# Altium PCB PCB_Bigger.PcbDoc
Units mil, origin at the board's own origin, x right, y up, seen from the top; angles counter-clockwise.
Board outline 3543.31 x 3543.31 mil, 2 copper layers (Top Layer, Bottom Layer); 1 components, 3 nets, 5 pads, 0 vias.
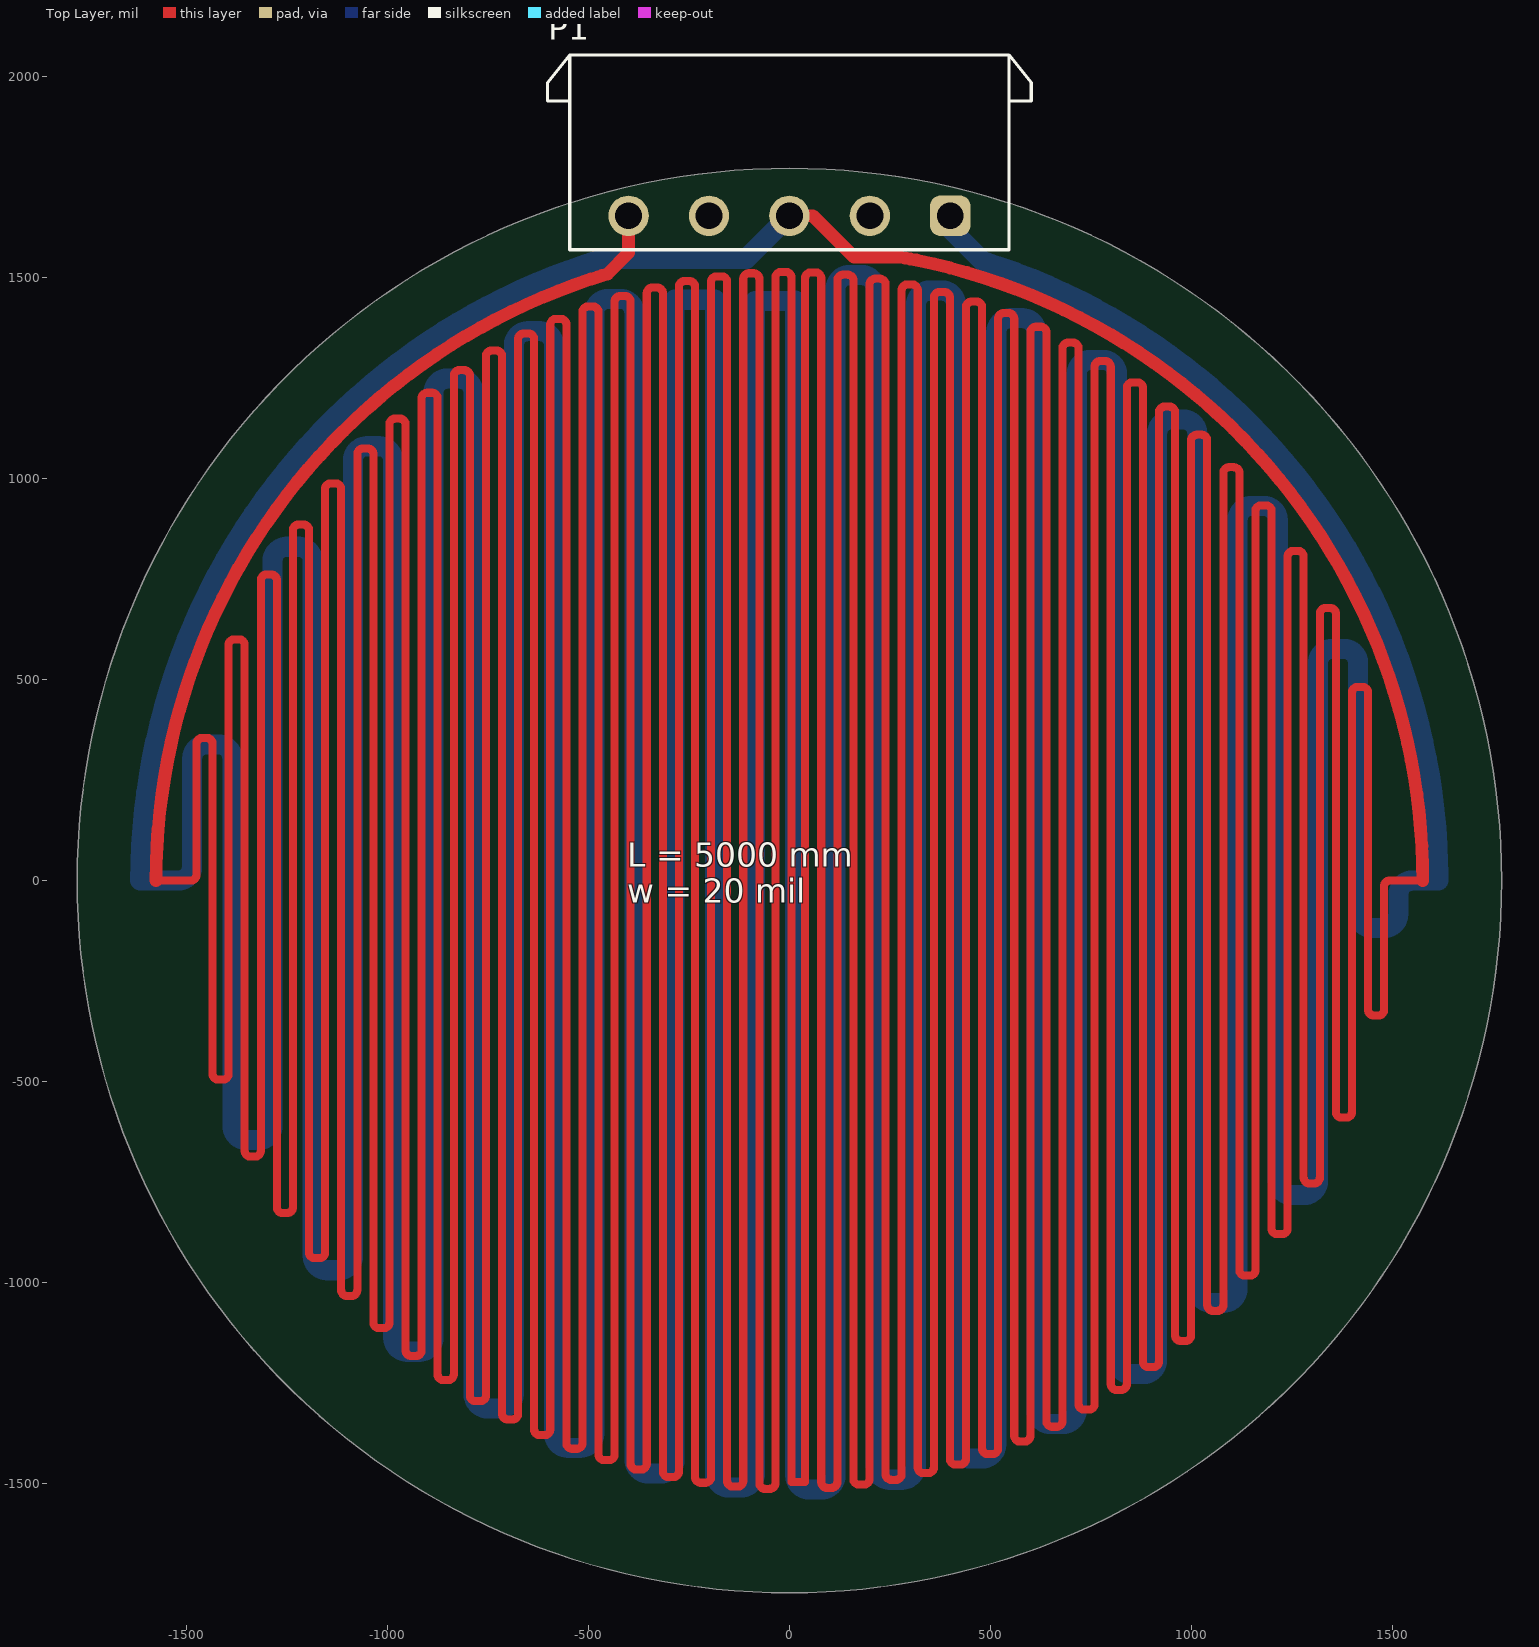
[diagram p0: Top Layer view]
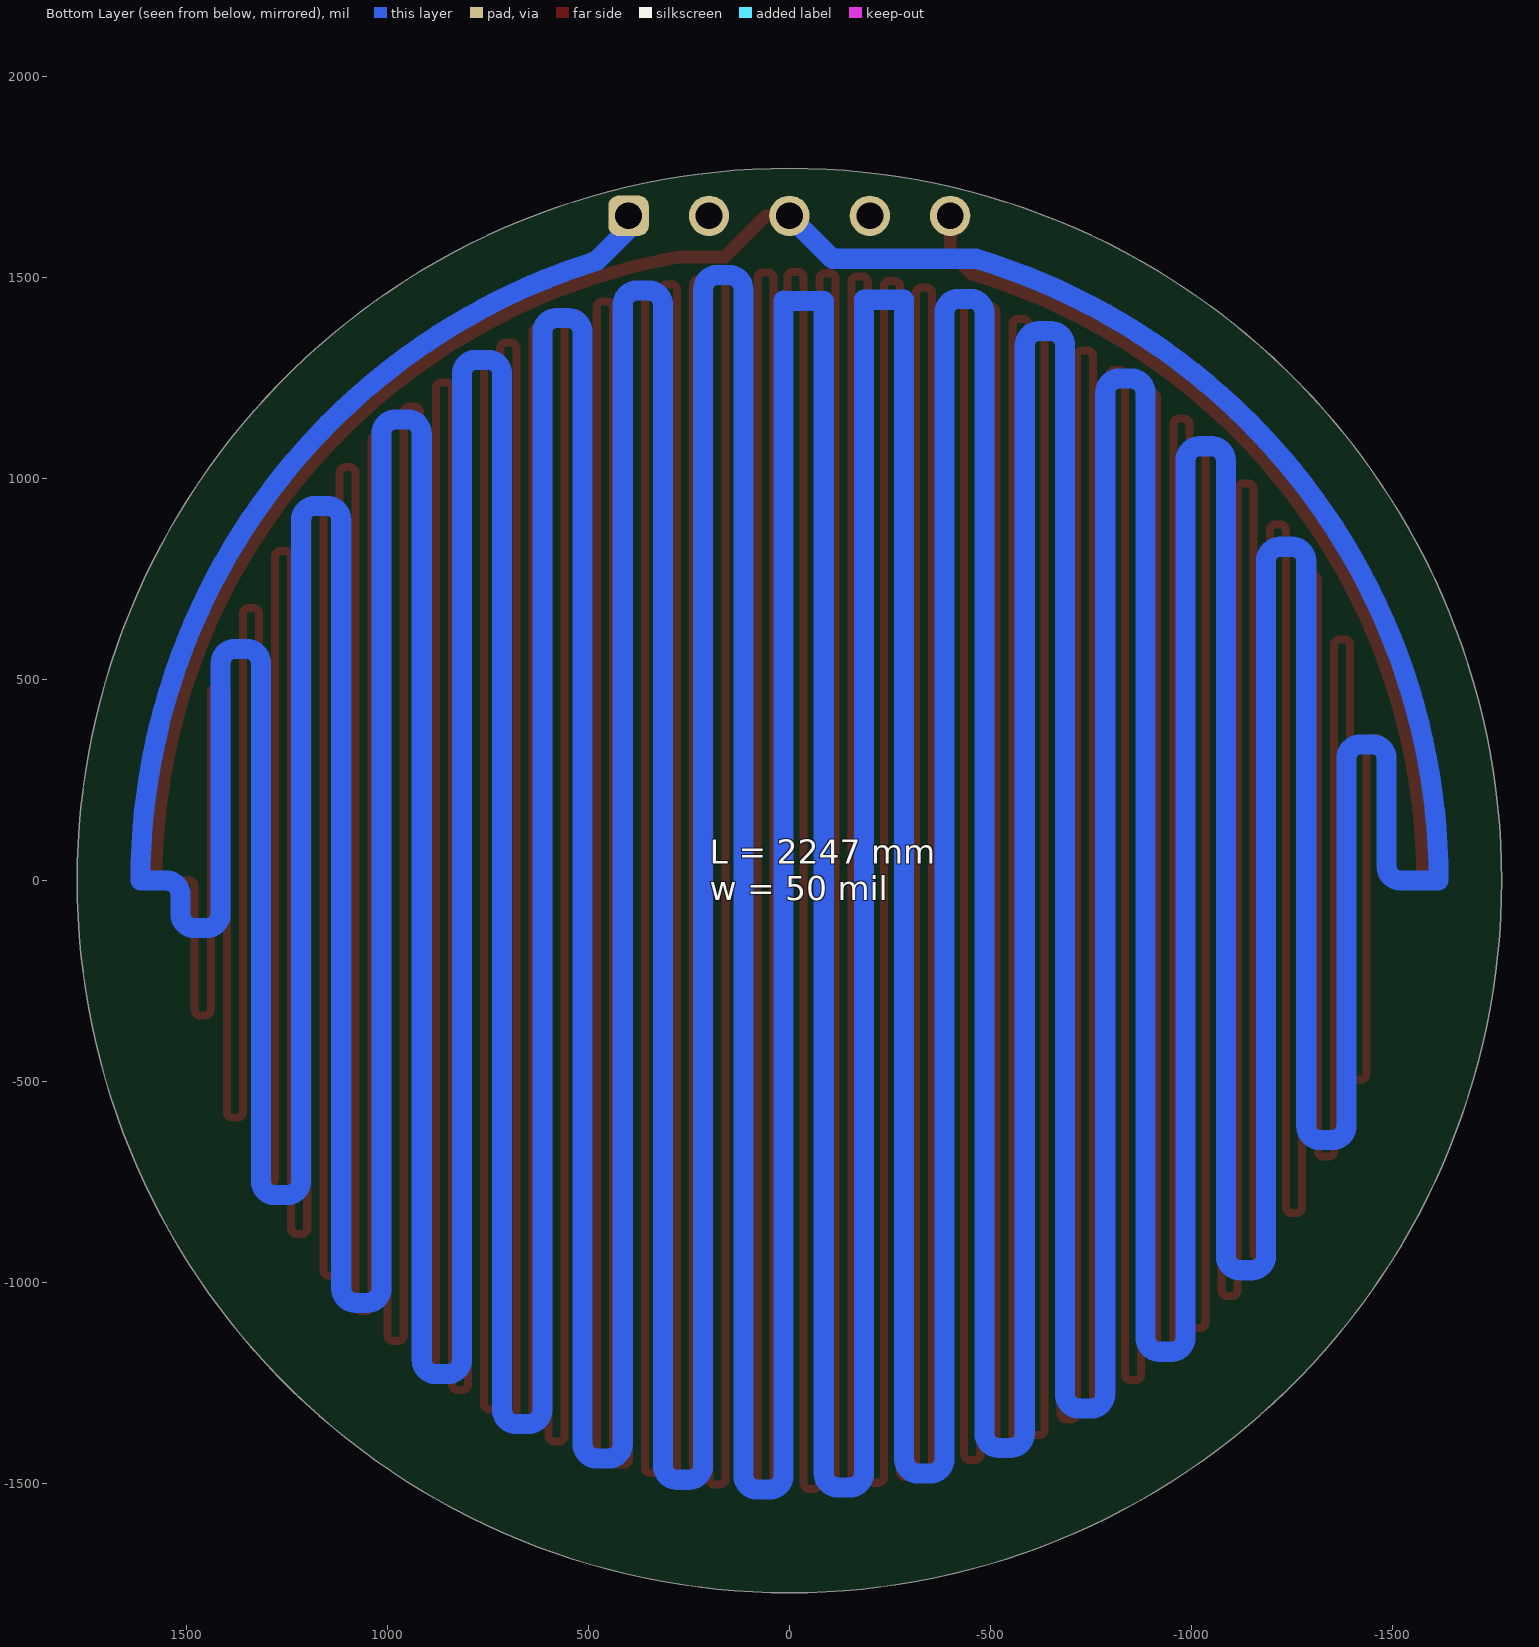
[diagram p1: Bottom Layer view, seen from below]

## Layer stack, top to bottom
Top Solder: solder mask 0.4, Solder Resist, Dk 3.5
Top Layer: signal copper 1.4
Dielectric 1: dielectric 12.6, FR-4, Dk 4.8
Bottom Layer: signal copper 1.4
Bottom Solder: solder mask 0.4, Solder Resist, Dk 3.5

## Board outline
-1771.65,0 ccw(c0,0) 0,-1771.65 ccw(c0,0) 1771.65,0 ccw(c0,0) 0,1771.65 ccw(c0,0)

## Design rules (kind name [scope] priority, off if disabled: settings)
Clearance [All] p1: gap=10
PolygonConnect [All] p1: connectstyle=Relief reliefconductorwidth=10 reliefentries=4 polygonreliefangle="90 Angle" airgapwidth=10
RoutingVias [All] p1: holewidth=28 width=50 viastyle="Through Hole" minholewidth=28 minwidth=50 maxholewidth=28 maxwidth=50
SolderMaskExpansion [All] p1: expansion=4
Width [All] p1: maxlimit=50 minlimit=10 preferedwidth=20 minimp=50.000000 maximp=50.000000 favimp=50.000000
30 further rules are at their usual default settings.

## Components (designator, comment, footprint, x,y, rotation, side; value= is the part's Value field where it differs from the comment)
P1 "691305540005" 691305540005 0,1811.02 r180 top

## Footprints (in the part's own frame and the unit in brackets; to place one, negate y for a bottom-side part, rotate by r counter-clockwise, add the part's x,y. Pads: shape width x height; smd on the part's side, far side on the other; paste and mask are expansions set on the pad)
691305540005 [mm] "5,08mm - PCB Header Horizontal Entry with Plastic Latches - 05p"
  rrect50% 2.55x2.55 hole 1.7: 1(-10.16,4)
  round 2.55 hole 1.7: 2(-5.08,4) 3(0,4) 4(5.08,4) 5(10.16,4)
  silkscreen extent -15.27,-6.15 15.27,6.15, body extent -15.1,-6 15.1,6, height 8.63

## Part data
P1: library part CMP-03913-99613978-1, "691305540005 Terminal Block, R/A Header, 5Pos, Th Rohs Compliant: Yes"

## Nets (pads, with @x,y where several pads share a name; then routed paths per layer and width w, separated by ;. In a path a pad name is that pad's centre, name@x,y a point inside that pad or via, vN(x,y) a via of type N, cw(c..) or ccw(c..) an arc to the next point about the centre after c; other vN are vias at no path point)
FUSE_1: P1.2
FUSE_2: P1.4
NetP1_1: P1.1 P1.3 P1.5 | length 263051.9
  Top Layer w20: -1575.3,0 -1488.8,0 ccw(c-1488.8,14) -1474.8,14 -1474.8,340.68 cw(c-1460.8,340.68) -1460.8,354.68 -1448.8,354.68 cw(c-1448.8,340.68) -1434.8,340.68 -1434.8,-480.96 ccw(c-1420.8,-480.96) -1420.8,-494.96 -1408.8,-494.96 ccw(c-1408.8,-480.96) -1394.8,-480.96 -1394.8,585.99 cw(c-1380.8,585.99) -1380.8,599.99 -1368.8,599.99 cw(c-1368.8,585.99) -1354.8,585.99 -1354.8,-672.5 ccw(c-1340.8,-672.5) -1340.8,-686.5 -1328.8,-686.5 ccw(c-1328.8,-672.5) -1314.8,-672.5 -1314.8,746.94 cw(c-1300.8,746.94) -1300.8,760.94 -1288.8,760.94 cw(c-1288.8,746.94) -1274.8,746.94 -1274.8,-812.64 ccw(c-1260.8,-812.64) -1260.8,-826.64 -1248.8,-826.64 ccw(c-1248.8,-812.64) -1234.8,-812.64 -1234.8,871.58 cw(c-1220.8,871.58) -1220.8,885.58 -1208.8,885.58 cw(c-1208.8,871.58) -1194.8,871.58 -1194.8,-925.05 ccw(c-1180.8,-925.05) -1180.8,-939.05 -1168.8,-939.05 ccw(c-1168.8,-925.05) -1154.8,-925.05 -1154.8,973.95 cw(c-1140.8,973.95) -1140.8,987.95 -1128.8,987.95 cw(c-1128.8,973.95) -1114.8,973.95 -1114.8,-1018.94 ccw(c-1100.8,-1018.94) -1100.8,-1032.94 -1088.8,-1032.94 ccw(c-1088.8,-1018.94) -1074.8,-1018.94 -1074.8,1060.52 cw(c-1060.8,1060.52) -1060.8,1074.52 -1048.8,1074.52 cw(c-1048.8,1060.52) -1034.8,1060.52 -1034.8,-1099.08 ccw(c-1020.8,-1099.08) -1020.8,-1113.08 -1008.8,-1113.08 ccw(c-1008.8,-1099.08) -994.8,-1099.08 -994.8,1134.91 cw(c-980.8,1134.91) -980.8,1148.91 -968.8,1148.91 cw(c-968.8,1134.91) -954.8,1134.91 -954.8,-1168.29 ccw(c-940.8,-1168.29) -940.8,-1182.29 -928.8,-1182.29 ccw(c-928.8,-1168.29) -914.8,-1168.29 -914.8,1199.4 cw(c-900.8,1199.4) -900.8,1213.4 -888.8,1213.4 cw(c-888.8,1199.4) -874.8,1199.4 -874.8,-1228.42 ccw(c-860.8,-1228.42) -860.8,-1242.42 -848.8,-1242.42 ccw(c-848.8,-1228.42) -834.8,-1228.42 -834.8,1255.5 cw(c-820.8,1255.5) -820.8,1269.5 -808.8,1269.5 cw(c-808.8,1255.5) -794.8,1255.5 -794.8,-1280.76 ccw(c-780.8,-1280.76) -780.8,-1294.76 -768.8,-1294.76 ccw(c-768.8,-1280.76) -754.8,-1280.76 -754.8,1304.31 cw(c-740.8,1304.31) -740.8,1318.31 -728.8,1318.31 cw(c-728.8,1304.31) -714.8,1304.31 -714.8,-1326.23 ccw(c-700.8,-1326.23) -700.8,-1340.23 -688.8,-1340.23 ccw(c-688.8,-1326.23) -674.8,-1326.23 -674.8,1346.6 cw(c-660.8,1346.6) -660.8,1360.6 -648.8,1360.6 cw(c-648.8,1346.6) -634.8,1346.6 -634.8,-1365.51 ccw(c-620.8,-1365.51) -620.8,-1379.51 -608.8,-1379.51 ccw(c-608.8,-1365.51) -594.8,-1365.51 -594.8,1382.99 cw(c-580.8,1382.99) -580.8,1396.99 -568.8,1396.99 cw(c-568.8,1382.99) -554.8,1382.99 -554.8,-1399.12 ccw(c-540.8,-1399.12) -540.8,-1413.12 -528.8,-1413.12 ccw(c-528.8,-1399.12) -514.8,-1399.12 -514.8,1413.93 cw(c-500.8,1413.93) -500.8,1427.93 -488.8,1427.93 cw(c-488.8,1413.93) -474.8,1413.93 -474.8,-1427.47 ccw(c-460.8,-1427.47) -460.8,-1441.47 -448.8,-1441.47 ccw(c-448.8,-1427.47) -434.8,-1427.47 -434.8,1439.77 cw(c-420.8,1439.77) -420.8,1453.77 -408.8,1453.77 cw(c-408.8,1439.77) -394.8,1439.77 -394.8,-1450.86 ccw(c-380.8,-1450.86) -380.8,-1464.86 -368.8,-1464.86 ccw(c-368.8,-1450.86) -354.8,-1450.86 -354.8,1460.77 cw(c-340.8,1460.77) -340.8,1474.77 -328.8,1474.77 cw(c-328.8,1460.77) -314.8,1460.77 -314.8,-1469.53 ccw(c-300.8,-1469.53) -300.8,-1483.53 -288.8,-1483.53 ccw(c-288.8,-1469.53) -274.8,-1469.53 -274.8,1477.15 cw(c-260.8,1477.15) -260.8,1491.15 -248.8,1491.15 cw(c-248.8,1477.15) -234.8,1477.15 -234.8,-1483.66 ccw(c-220.8,-1483.66) -220.8,-1497.66 -208.8,-1497.66 ccw(c-208.8,-1483.66) -194.8,-1483.66 -194.8,1489.07 cw(c-180.8,1489.07) -180.8,1503.07 -168.8,1503.07 cw(c-168.8,1489.07) -154.8,1489.07 -154.8,-1493.38 ccw(c-140.8,-1493.38) -140.8,-1507.38 -128.8,-1507.38 ccw(c-128.8,-1493.38) -114.8,-1493.38 -114.8,1496.61 cw(c-100.8,1496.61) -100.8,1510.61 -88.8,1510.61 cw(c-88.8,1496.61) -74.8,1496.61 -74.8,-1498.77 ccw(c-60.8,-1498.77) -60.8,-1512.77 -48.8,-1512.77 ccw(c-48.8,-1498.77) -34.8,-1498.77 -34.8,1499.86 cw(c-20.8,1499.86) -20.8,1513.86 -8.8,1513.86 cw(c-8.8,1499.86) 5.2,1499.86 5.2,-1496.06 39.2,-1496.06 39.2,1498.58 cw(c53.2,1498.58) 53.2,1512.58 65.2,1512.58 cw(c65.2,1498.58) 79.2,1498.58 79.2,-1496.31 ccw(c93.2,-1496.31) 93.2,-1510.31 105.2,-1510.31 ccw(c105.2,-1496.31) 119.2,-1496.31 119.2,1492.96 cw(c133.2,1492.96) 133.2,1506.96 145.2,1506.96 cw(c145.2,1492.96) 159.2,1492.96 159.2,-1488.52 ccw(c173.2,-1488.52) 173.2,-1502.52 185.2,-1502.52 ccw(c185.2,-1488.52) 199.2,-1488.52 199.2,1483 cw(c213.2,1483) 213.2,1497 225.2,1497 cw(c225.2,1483) 239.2,1483 239.2,-1476.37 ccw(c253.2,-1476.37) 253.2,-1490.37 265.2,-1490.37 ccw(c265.2,-1476.37) 279.2,-1476.37 279.2,1468.62 cw(c293.2,1468.62) 293.2,1482.62 305.2,1482.62 cw(c305.2,1468.62) 319.2,1468.62 319.2,-1459.74 ccw(c333.2,-1459.74) 333.2,-1473.74 345.2,-1473.74 ccw(c345.2,-1459.74) 359.2,-1459.74 359.2,1449.7 cw(c373.2,1449.7) 373.2,1463.7 385.2,1463.7 cw(c385.2,1449.7) 399.2,1449.7 399.2,-1438.48 ccw(c413.2,-1438.48) 413.2,-1452.48 425.2,-1452.48 ccw(c425.2,-1438.48) 439.2,-1438.48 439.2,1426.04 cw(c453.2,1426.04) 453.2,1440.04 465.2,1440.04 cw(c465.2,1426.04) 479.2,1426.04 479.2,-1412.37 ccw(c493.2,-1412.37) 493.2,-1426.37 505.2,-1426.37 ccw(c505.2,-1412.37) 519.2,-1412.37 519.2,1397.41 cw(c533.2,1397.41) 533.2,1411.41 545.2,1411.41 cw(c545.2,1397.41) 559.2,1397.41 559.2,-1381.14 ccw(c573.2,-1381.14) 573.2,-1395.14 585.2,-1395.14 ccw(c585.2,-1381.14) 599.2,-1381.14 599.2,1363.5 cw(c613.2,1363.5) 613.2,1377.5 625.2,1377.5 cw(c625.2,1363.5) 639.2,1363.5 639.2,-1344.44 ccw(c653.2,-1344.44) 653.2,-1358.44 665.2,-1358.44 ccw(c665.2,-1344.44) 679.2,-1344.44 679.2,1323.9 cw(c693.2,1323.9) 693.2,1337.9 705.2,1337.9 cw(c705.2,1323.9) 719.2,1323.9 719.2,-1301.8 ccw(c733.2,-1301.8) 733.2,-1315.8 745.2,-1315.8 ccw(c745.2,-1301.8) 759.2,-1301.8 759.2,1278.07 cw(c773.2,1278.07) 773.2,1292.07 785.2,1292.07 cw(c785.2,1278.07) 799.2,1278.07 799.2,-1252.62 ccw(c813.2,-1252.62) 813.2,-1266.62 825.2,-1266.62 ccw(c825.2,-1252.62) 839.2,-1252.62 839.2,1225.33 cw(c853.2,1225.33) 853.2,1239.33 865.2,1239.33 cw(c865.2,1225.33) 879.2,1225.33 879.2,-1196.09 ccw(c893.2,-1196.09) 893.2,-1210.09 905.2,-1210.09 ccw(c905.2,-1196.09) 919.2,-1196.09 919.2,1164.74 cw(c933.2,1164.74) 933.2,1178.74 945.2,1178.74 cw(c945.2,1164.74) 959.2,1164.74 959.2,-1131.1 ccw(c973.2,-1131.1) 973.2,-1145.1 985.2,-1145.1 ccw(c985.2,-1131.1) 999.2,-1131.1 999.2,1094.98 cw(c1013.2,1094.98) 1013.2,1108.98 1025.2,1108.98 cw(c1025.2,1094.98) 1039.2,1094.98 1039.2,-1056.11 ccw(c1053.2,-1056.11) 1053.2,-1070.11 1065.2,-1070.11 ccw(c1065.2,-1056.11) 1079.2,-1056.11 1079.2,1014.17 cw(c1093.2,1014.17) 1093.2,1028.17 1105.2,1028.17 cw(c1105.2,1014.17) 1119.2,1014.17 1119.2,-968.78 ccw(c1133.2,-968.78) 1133.2,-982.78 1145.2,-982.78 ccw(c1145.2,-968.78) 1159.2,-968.78 1159.2,919.41 cw(c1173.2,919.41) 1173.2,933.41 1185.2,933.41 cw(c1185.2,919.41) 1199.2,919.41 1199.2,-865.39 ccw(c1213.2,-865.39) 1213.2,-879.39 1225.2,-879.39 ccw(c1225.2,-865.39) 1239.2,-865.39 1239.2,805.78 cw(c1253.2,805.78) 1253.2,819.78 1265.2,819.78 cw(c1265.2,805.78) 1279.2,805.78 1279.2,-739.23 ccw(c1293.2,-739.23) 1293.2,-753.23 1305.2,-753.23 ccw(c1305.2,-739.23) 1319.2,-739.23 1319.2,663.66 cw(c1333.2,663.66) 1333.2,677.66 1345.2,677.66 cw(c1345.2,663.66) 1359.2,663.66 1359.2,-575.53 ccw(c1373.2,-575.53) 1373.2,-589.53 1385.2,-589.53 ccw(c1385.2,-575.53) 1399.2,-575.53 1399.2,467.78 cw(c1413.2,467.78) 1413.2,481.78 1425.2,481.78 cw(c1425.2,467.78) 1439.2,467.78 1439.2,-321.25 ccw(c1453.2,-321.25) 1453.2,-335.25 1465.2,-335.25 ccw(c1465.2,-321.25) 1479.2,-321.25 1479.2,-14 cw(c1493.2,-14) 1493.2,0 1575.3,0
  Top Layer w32: P1.5 -400,1561.52 -452.66,1508.86 ; P1.3 58.07,1653.54 160.25,1551.36 273.55,1551.36 ; -1575.3,0 cw(c0,0) -452.66,1508.86 ; -1575.3,0 cw(c0,0) -1575.27,8.27 ; -1575.3,0 cw(c0,0) -1575.27,8.27 ; -1575.3,0 cw(c0,0) -1575.27,8.27 ; -1575.3,0 cw(c0,0) -1575.27,8.27 ; -1575.3,0 cw(c0,0) -1575.27,8.27 ; -1575.3,0 cw(c0,0) -1575.27,8.27 ; -1575.3,0 cw(c0,0) -1575.27,8.27 ; -478.92,1500.73 cw(c0,0) -452.66,1508.86 ; -478.92,1500.73 cw(c0,0) -452.66,1508.86 ; -478.92,1500.73 cw(c0,0) -452.66,1508.86 ; -478.92,1500.73 cw(c0,0) -452.66,1508.86 ; -478.92,1500.73 cw(c0,0) -452.66,1508.86 ; -478.92,1500.73 cw(c0,0) -452.66,1508.86 ; -478.92,1500.73 cw(c0,0) -452.66,1508.86 ; 271.55,1551.71 cw(c0,0) 273.55,1551.36 ; 271.55,1551.71 cw(c0,0) 273.55,1551.36 ; 271.55,1551.71 cw(c0,0) 273.55,1551.36 ; 271.55,1551.71 cw(c0,0) 273.55,1551.36 ; 271.55,1551.71 cw(c0,0) 273.55,1551.36 ; 271.55,1551.71 cw(c0,0) 273.55,1551.36 ; 271.55,1551.71 cw(c0,0) 273.55,1551.36 ; 271.55,1551.71 cw(c0,0) 273.55,1551.36 ; 273.55,1551.36 cw(c0,0) 1575.3,0 ; 273.55,1551.36 cw(c0,0) 300.58,1546.35 ; 273.55,1551.36 cw(c0,0) 300.58,1546.35 ; 273.55,1551.36 cw(c0,0) 300.58,1546.35 ; 273.55,1551.36 cw(c0,0) 300.58,1546.35 ; 273.55,1551.36 cw(c0,0) 300.58,1546.35 ; 273.55,1551.36 cw(c0,0) 300.58,1546.35 ; 273.55,1551.36 cw(c0,0) 300.58,1546.35 ; 1575.06,27.49 cw(c0,0) 1575.3,0 ; 1575.06,27.49 cw(c0,0) 1575.3,0 ; 1575.06,27.49 cw(c0,0) 1575.3,0 ; 1575.06,27.49 cw(c0,0) 1575.3,0 ; 1575.06,27.49 cw(c0,0) 1575.3,0 ; 1575.06,27.49 cw(c0,0) 1575.3,0 ; 1575.06,27.49 cw(c0,0) 1575.3,0
  Bottom Layer w50: P1.3 -106.99,1546.56 -463.97,1546.56 ; P1.1 400,1620.82 479.52,1541.3 ; -1614.65,0 cw(c0,0) -463.97,1546.56 ; -1614.65,0 cw(c0,0) -1614.63,8.48 ; -1614.65,0 cw(c0,0) -1614.63,8.48 ; -1614.65,0 cw(c0,0) -1614.63,8.48 ; -1614.65,0 -1520.43,0 ccw(c-1520.43,35) -1485.43,35 -1485.43,303.76 cw(c-1450.43,303.76) -1450.43,338.76 -1420.43,338.76 cw(c-1420.43,303.76) -1385.43,303.76 -1385.43,-610.21 ccw(c-1350.43,-610.21) -1350.43,-645.21 -1320.43,-645.21 ccw(c-1320.43,-610.21) -1285.43,-610.21 -1285.43,795.26 cw(c-1250.43,795.26) -1250.43,830.26 -1220.43,830.26 cw(c-1220.43,795.26) -1185.43,795.26 -1185.43,-934.09 ccw(c-1150.43,-934.09) -1150.43,-969.09 -1120.43,-969.09 ccw(c-1120.43,-934.09) -1085.43,-934.09 -1085.43,1045.28 cw(c-1050.43,1045.28) -1050.43,1080.28 -1020.43,1080.28 cw(c-1020.43,1045.28) -985.43,1045.28 -985.43,-1136.97 ccw(c-950.43,-1136.97) -950.43,-1171.97 -920.43,-1171.97 ccw(c-920.43,-1136.97) -885.43,-1136.97 -885.43,1213.59 cw(c-850.43,1213.59) -850.43,1248.59 -820.43,1248.59 cw(c-820.43,1213.59) -785.43,1213.59 -785.43,-1277.84 ccw(c-750.43,-1277.84) -750.43,-1312.84 -720.43,-1312.84 ccw(c-720.43,-1277.84) -685.43,-1277.84 -685.43,1331.53 cw(c-650.43,1331.53) -650.43,1366.53 -620.43,1366.53 cw(c-620.43,1331.53) -585.43,1331.53 -585.43,-1375.88 ccw(c-550.43,-1375.88) -550.43,-1410.88 -520.43,-1410.88 ccw(c-520.43,-1375.88) -485.43,-1375.88 -485.43,1411.79 cw(c-450.43,1411.79) -450.43,1446.79 -420.43,1446.79 cw(c-420.43,1411.79) -385.43,1411.79 -385.43,-1439.87 ccw(c-350.43,-1439.87) -350.43,-1474.87 -320.43,-1474.87 ccw(c-320.43,-1439.87) -285.43,-1439.87 -285.43,1444.65 -185.66,1444.65 -185.43,1444.88 -185.43,-1474.24 ccw(c-150.43,-1474.24) -150.43,-1509.24 -120.43,-1509.24 ccw(c-120.43,-1474.24) -85.43,-1474.24 -85.43,1441.93 13.58,1441.93 14.57,1442.91 14.57,-1479.76 ccw(c49.57,-1479.76) 49.57,-1514.76 79.57,-1514.76 ccw(c79.57,-1479.76) 114.57,-1479.76 114.57,1470.98 cw(c149.57,1470.98) 149.57,1505.98 179.57,1505.98 cw(c179.57,1470.98) 214.57,1470.98 214.57,-1455.29 ccw(c249.57,-1455.29) 249.57,-1490.29 279.57,-1490.29 ccw(c279.57,-1455.29) 314.57,-1455.29 314.57,1432.46 cw(c349.57,1432.46) 349.57,1467.46 379.57,1467.46 cw(c379.57,1432.46) 414.57,1432.46 414.57,-1402.16 ccw(c449.57,-1402.16) 449.57,-1437.16 479.57,-1437.16 ccw(c479.57,-1402.16) 514.57,-1402.16 514.57,1363.87 cw(c549.57,1363.87) 549.57,1398.87 579.57,1398.87 cw(c579.57,1363.87) 614.57,1363.87 614.57,-1316.9 ccw(c649.57,-1316.9) 649.57,-1351.9 679.57,-1351.9 ccw(c679.57,-1316.9) 714.57,-1316.9 714.57,1260.28 cw(c749.57,1260.28) 749.57,1295.28 779.57,1295.28 cw(c779.57,1260.28) 814.57,1260.28 814.57,-1192.64 ccw(c849.57,-1192.64) 849.57,-1227.64 879.57,-1227.64 ccw(c879.57,-1192.64) 914.57,-1192.64 914.57,1111.97 cw(c949.57,1111.97) 949.57,1146.97 979.57,1146.97 cw(c979.57,1111.97) 1014.57,1111.97 1014.57,-1015.17 ccw(c1049.57,-1015.17) 1049.57,-1050.17 1079.57,-1050.17 ccw(c1079.57,-1015.17) 1114.57,-1015.17 1114.57,897.02 cw(c1149.57,897.02) 1149.57,932.02 1179.57,932.02 cw(c1179.57,897.02) 1214.57,897.02 1214.57,-747.49 ccw(c1249.57,-747.49) 1249.57,-782.49 1279.57,-782.49 ccw(c1279.57,-747.49) 1314.57,-747.49 1314.57,541.13 cw(c1349.57,541.13) 1349.57,576.13 1379.57,576.13 cw(c1379.57,541.13) 1414.57,541.13 1414.57,-83.13 ccw(c1449.57,-83.13) 1449.57,-118.13 1479.57,-118.13 ccw(c1479.57,-83.13) 1514.57,-83.13 1514.57,-35 cw(c1549.57,-35) 1549.57,0 1614.17,0 ; -490.89,1538.22 cw(c0,0) -463.97,1546.56 ; -490.89,1538.22 cw(c0,0) -463.97,1546.56 ; -490.89,1538.22 cw(c0,0) -463.97,1546.56 ; 479.52,1541.3 cw(c0,0) 1614.17,0 ; 479.52,1541.3 cw(c0,0) 498.81,1535.17 ; 479.52,1541.3 cw(c0,0) 498.81,1535.17 ; 479.52,1541.3 cw(c0,0) 498.81,1535.17 ; 1613.93,28.17 cw(c0,0) 1614.17,0 ; 1613.93,28.17 cw(c0,0) 1614.17,0 ; 1613.93,28.17 cw(c0,0) 1614.17,0

## Silkscreen, mask and mechanical layers (free items; w line width, h text height)
Top Overlay:
  text "L = 5000 mm / w = 20 mil" at -403.54,-55.12 h60
Bottom Overlay:
  text "L = 2247 mm / w = 50 mil" at 197.99,-48.39 h60
Mechanical 1:
  circle w0.39: c0,0 r1771.65